# EAGLE board TripleHalfBridge-IR2302 (EAGLE 6.4)

Size 50.8 x 34.29 mm. Coordinates in mm from the lower left corner, seen from the top.
Outline: 0,34.29 0,0 50.8,0 50.8,34.29 0,34.29
Copper layers (1*16): Top 0.0356mm / dielectric 1.5011mm / Bottom 0.0356mm
Design rules "LaenPCBOrder": minimum track width 6mil, minimum drill 13mil, track to track 6mil, track to pad 6mil, pad to pad 6mil, via to via 6mil, smd to smd 6mil, copper to edge 15mil, drill to drill 6mil, minimum pad ring 7mil, minimum via ring 7mil, stop-mask expansion 4mil, vias tented up to drill 0mil, thermal gap 10mil

## Footprints (pad centres in the part's own frame; a part is rotated, then mirrored left to right if it is on the bottom)
TO220V = drill 1.016 long: 1 -2.54,-2.54; 2 0,-2.54; 3 2.54,-2.54
1,6/0,8 = drill 0.813 pad 1.6 octagon: 1 0,0
D-5 = drill 0.813 octagon: A 2.54,0; C -2.54,0
DIL8 = drill 0.813 long: 1 -3.81,-3.81; 2 -1.27,-3.81; 3 1.27,-3.81; 4 3.81,-3.81; 5 3.81,3.81; 6 1.27,3.81; 7 -1.27,3.81; 8 -3.81,3.81
C025-024X044 = drill 0.813 octagon: 1 -1.27,0; 2 1.27,0
2,8 = hole 2.8: 0,0
R-5 = drill 0.813 pad 1.6 octagon: 1 -2.54,0; 2 2.54,0

## Placement (x,y rotation side)
E$1  [TO220V]  20.19,26.16 270 top
E$2  [1,6/0,8]  69.85,27.18 0 top  (outside the outline)
E$3  [1,6/0,8]  78.23,27.18 0 top  (outside the outline)
E$4  [D-5]  52.58,41.66 270 top  (outside the outline)
E$5  [D-5]  62.48,26.42 180 top  (outside the outline)
E$6  [D-5]  62.48,24.38 180 top  (outside the outline)
E$7  [D-5]  39.88,41.66 270 top  (outside the outline)
E$8  [1,6/0,8]  75.69,27.18 0 top  (outside the outline)
E$9  [TO220V]  19.94,7.87 270 top
E$10  [TO220V]  15.62,7.87 270 top
E$11  [TO220V]  25.53,26.16 270 top
E$12  [1,6/0,8]  72.39,27.18 0 top  (outside the outline)
E$13  [TO220V]  29.84,26.16 270 top
E$14  [TO220V]  29.59,7.87 270 top
E$15  [TO220V]  25.27,7.87 270 top
E$16  [TO220V]  35.18,26.16 270 top
E$17  [1,6/0,8]  74.93,13.72 90 top  (outside the outline)
E$18  [1,6/0,8]  80.01,13.72 90 top  (outside the outline)
E$19  [1,6/0,8]  82.55,13.72 90 top  (outside the outline)
E$20  [1,6/0,8]  85.09,13.72 90 top  (outside the outline)
E$21  [1,6/0,8]  77.47,13.72 90 top  (outside the outline)
E$22  [TO220V]  39.5,26.16 270 top
E$23  [TO220V]  39.24,7.87 270 top
E$24  [TO220V]  34.92,7.87 270 top
E$25  [1,6/0,8]  72.39,13.72 90 top  (outside the outline)
E$26  [1,6/0,8]  55.63,28.45 0 top  (outside the outline)
E$27  [1,6/0,8]  53.09,25.91 0 top
E$28  [1,6/0,8]  55.63,25.91 0 top  (outside the outline)
E$29  [DIL8]  46.23,41.66 0 top  (outside the outline)
E$30  [C025-024X044]  44.96,42.93 0 top  (outside the outline)
E$31  [C025-024X044]  46.23,40.39 0 top  (outside the outline)
E$32  [C025-024X044]  57.66,42.93 0 top  (outside the outline)
E$33  [1,6/0,8]  53.09,28.45 0 top
E$34  [1,6/0,8]  55.63,23.37 0 top  (outside the outline)
E$35  [1,6/0,8]  53.09,20.83 0 top
E$36  [1,6/0,8]  55.63,20.83 0 top  (outside the outline)
E$37  [1,6/0,8]  53.09,23.37 0 top
E$38  [C025-024X044]  58.93,40.39 0 top  (outside the outline)
E$39  [D-5]  27.18,41.66 270 top  (outside the outline)
E$40  [2,8]  5.08,29.21 0 top
E$41  [DIL8]  33.53,41.66 0 top  (outside the outline)
E$42  [2,8]  45.72,5.08 0 top
E$43  [C025-024X044]  32.26,42.93 0 top  (outside the outline)
E$44  [R-5]  78.99,17.78 180 top  (outside the outline)
E$45  [C025-024X044]  33.53,40.39 0 top  (outside the outline)
E$53  [TO220V]  15.88,26.16 270 top
E$56  [DIL8]  58.93,41.66 0 top  (outside the outline)

## Library data of the parts
E$1 E$9-E$11 E$13-E$16 E$22-E$24 E$53 = transistor-pnp
E$2 E$3 E$8 E$12 E$17-E$21 E$25-E$28 E$33-E$37 = wirepad
E$4-E$7 E$39 = diode
E$29 E$41 E$56 = microchip
E$30-E$32 E$38 E$43 E$45 = rcl
E$40 E$42 = holes
E$44 = discrete

## Nets
S$1: E$1.3 E$53.3
S$2: E$26.1
S$3: E$4.C
S$4: E$5.C
S$5: E$6.C
S$6: E$1.2 E$53.2
S$7: E$1.1 E$53.1
S$8: E$9.1 E$10.1
S$9: E$9.2 E$10.2
S$10: E$13.3
S$11: E$25.1 E$44.2
S$12: E$13.2
S$13: E$14.1
S$14: E$14.2
S$15: E$14.3
S$16: E$28.1
S$17: E$22.3
S$18: E$34.1
S$19: E$22.2
S$20: E$36.1
S$21: E$23.1
S$23: E$23.2
S$24: E$17.1 E$44.1
S$25: E$9.3 E$10.3
S$26: E$18.1
S$27: E$19.1
S$28: E$23.3
S$29: E$11.1 E$13.1
S$30: E$16.1 E$22.1

## Tracks (layer width: path | path; a pad name or v marks a point on that pad's centre or on a via)
S$1  (1 unrouted)
S$6  (1 unrouted)
S$7  (1 unrouted)
S$8  (1 unrouted)
S$9  (1 unrouted)
S$10  (1 unrouted)
S$11  (1 unrouted)
S$12  (1 unrouted)
S$13  (1 unrouted)
S$14  (1 unrouted)
S$15  (1 unrouted)
S$17  (1 unrouted)
S$19  (1 unrouted)
S$21  (1 unrouted)
S$23  (1 unrouted)
S$24  (1 unrouted)
S$25  (1 unrouted)
S$28  (1 unrouted)
S$29  (1 unrouted)
S$30  (1 unrouted)

## Text on the board
tNames: Triple Half Bridge | Logic In | Float In | Power In | H1 | EN1 | GND | VCC | GND | VDD | H2 | EN2 | H3 | EN3 | Shunt | H4 | EN4 | Sense Out | Power Out | REF | SNS | O1 | O2 | O3 | O4 | Brent M. Spell